# Altium PCB processor.PcbDoc
Units mm, origin at the board's own origin, x right, y up, seen from the top; angles counter-clockwise.
Board outline 35.25 x 27.25 mm, 4 copper layers (Top Layer, GND, VCC, Bottom Layer), stack 0.778 mm thick; 57 components, 50 nets, 257 pads, 50 vias.
Unrouted connection lines stored in the file: 1.
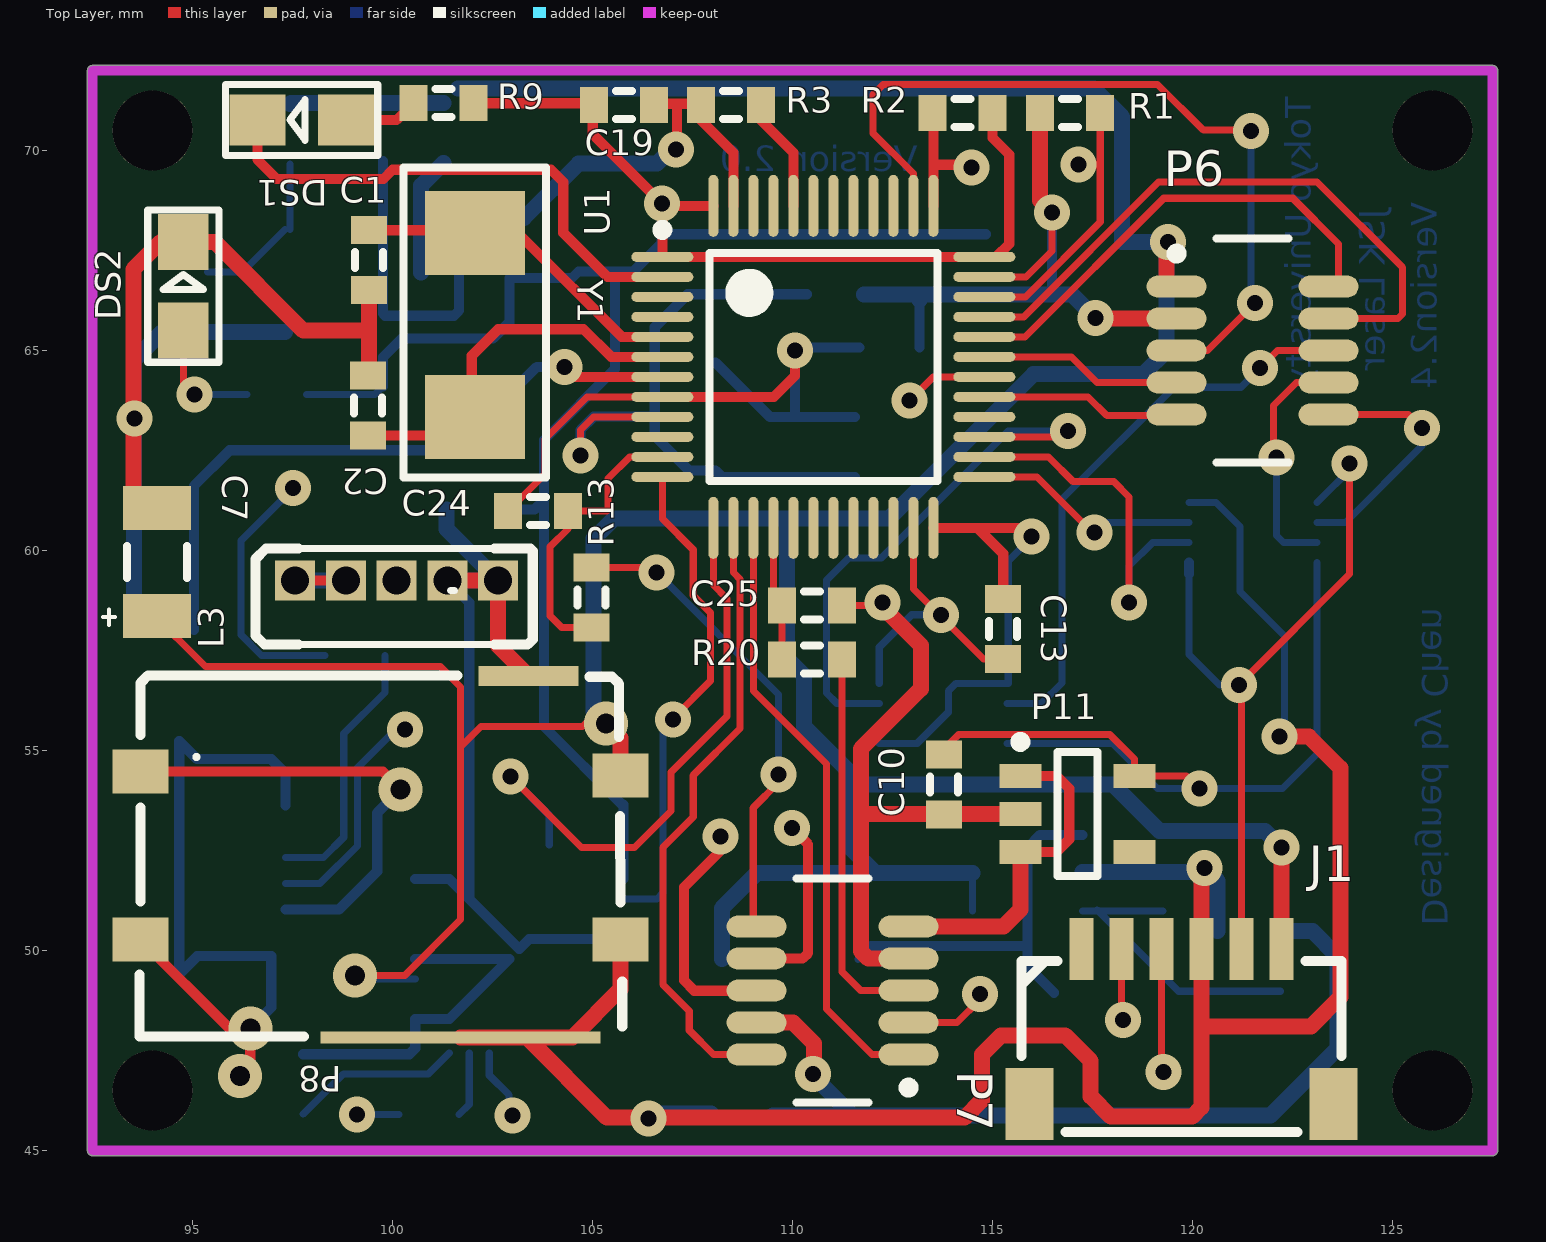
[diagram p0: Top Layer view]
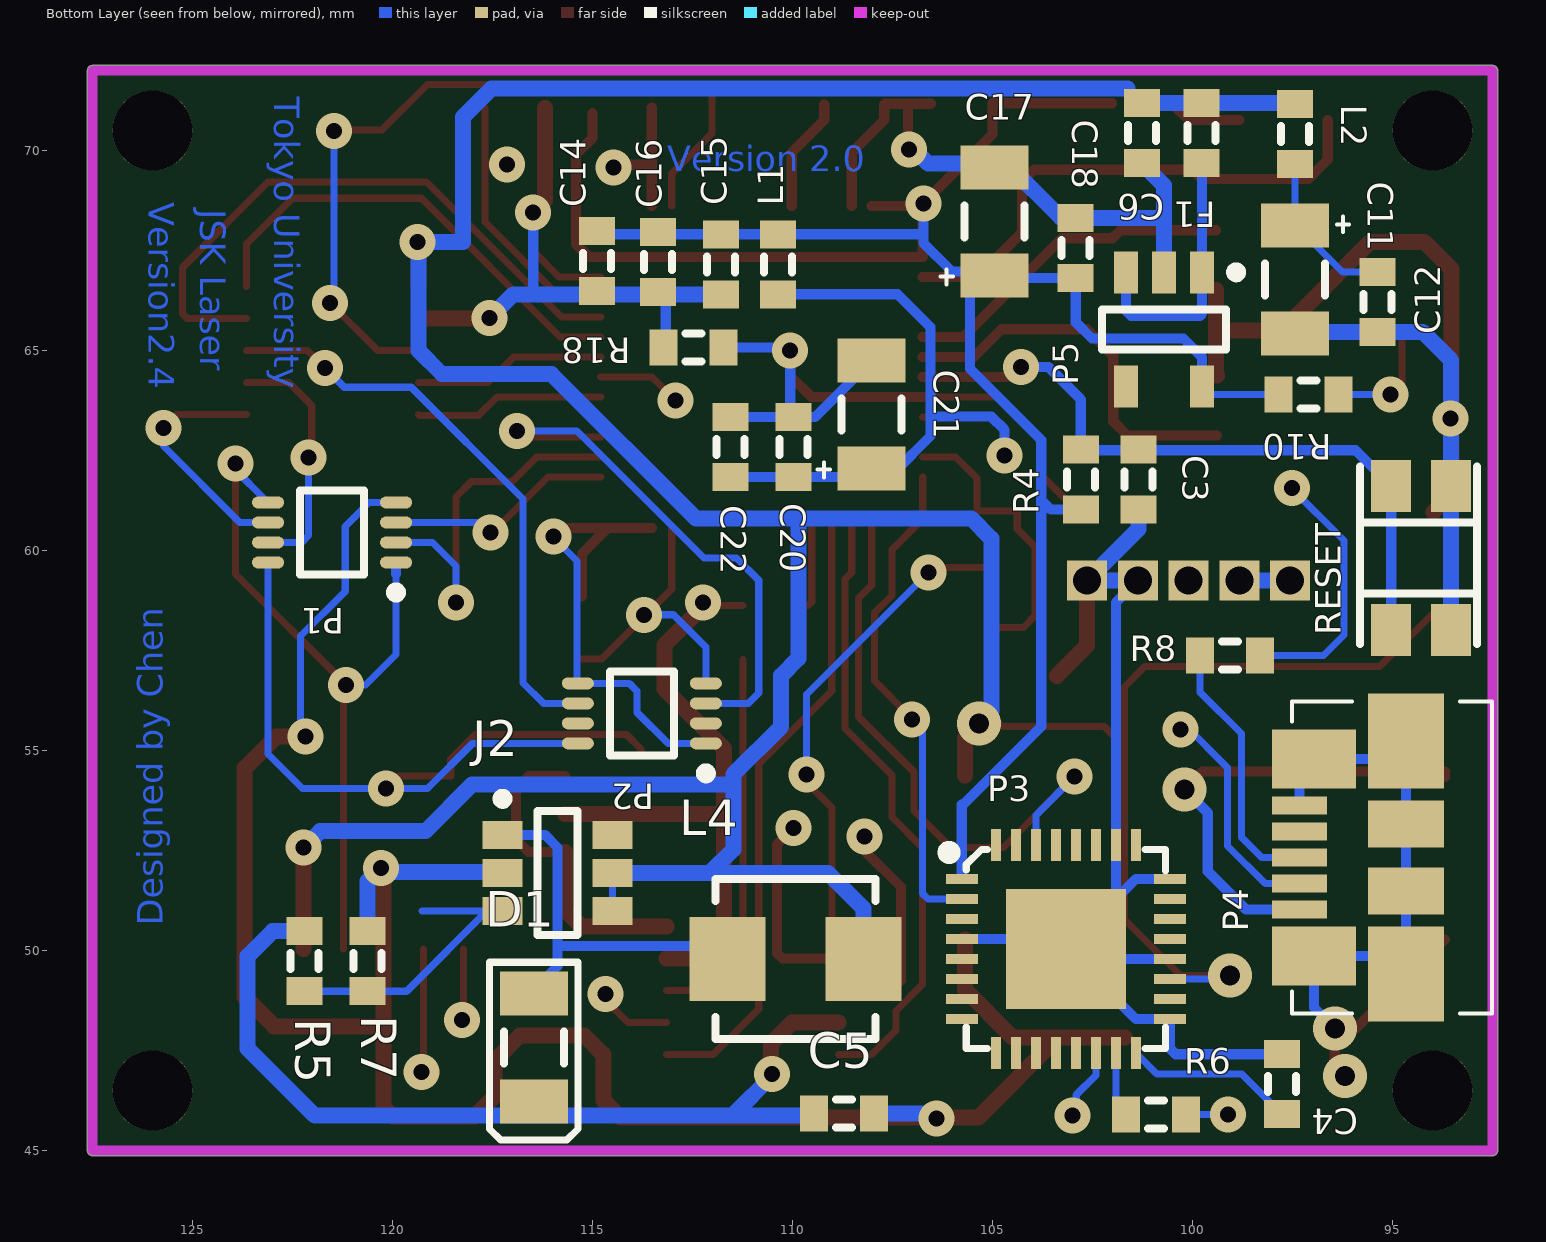
[diagram p1: Bottom Layer view, seen from below]
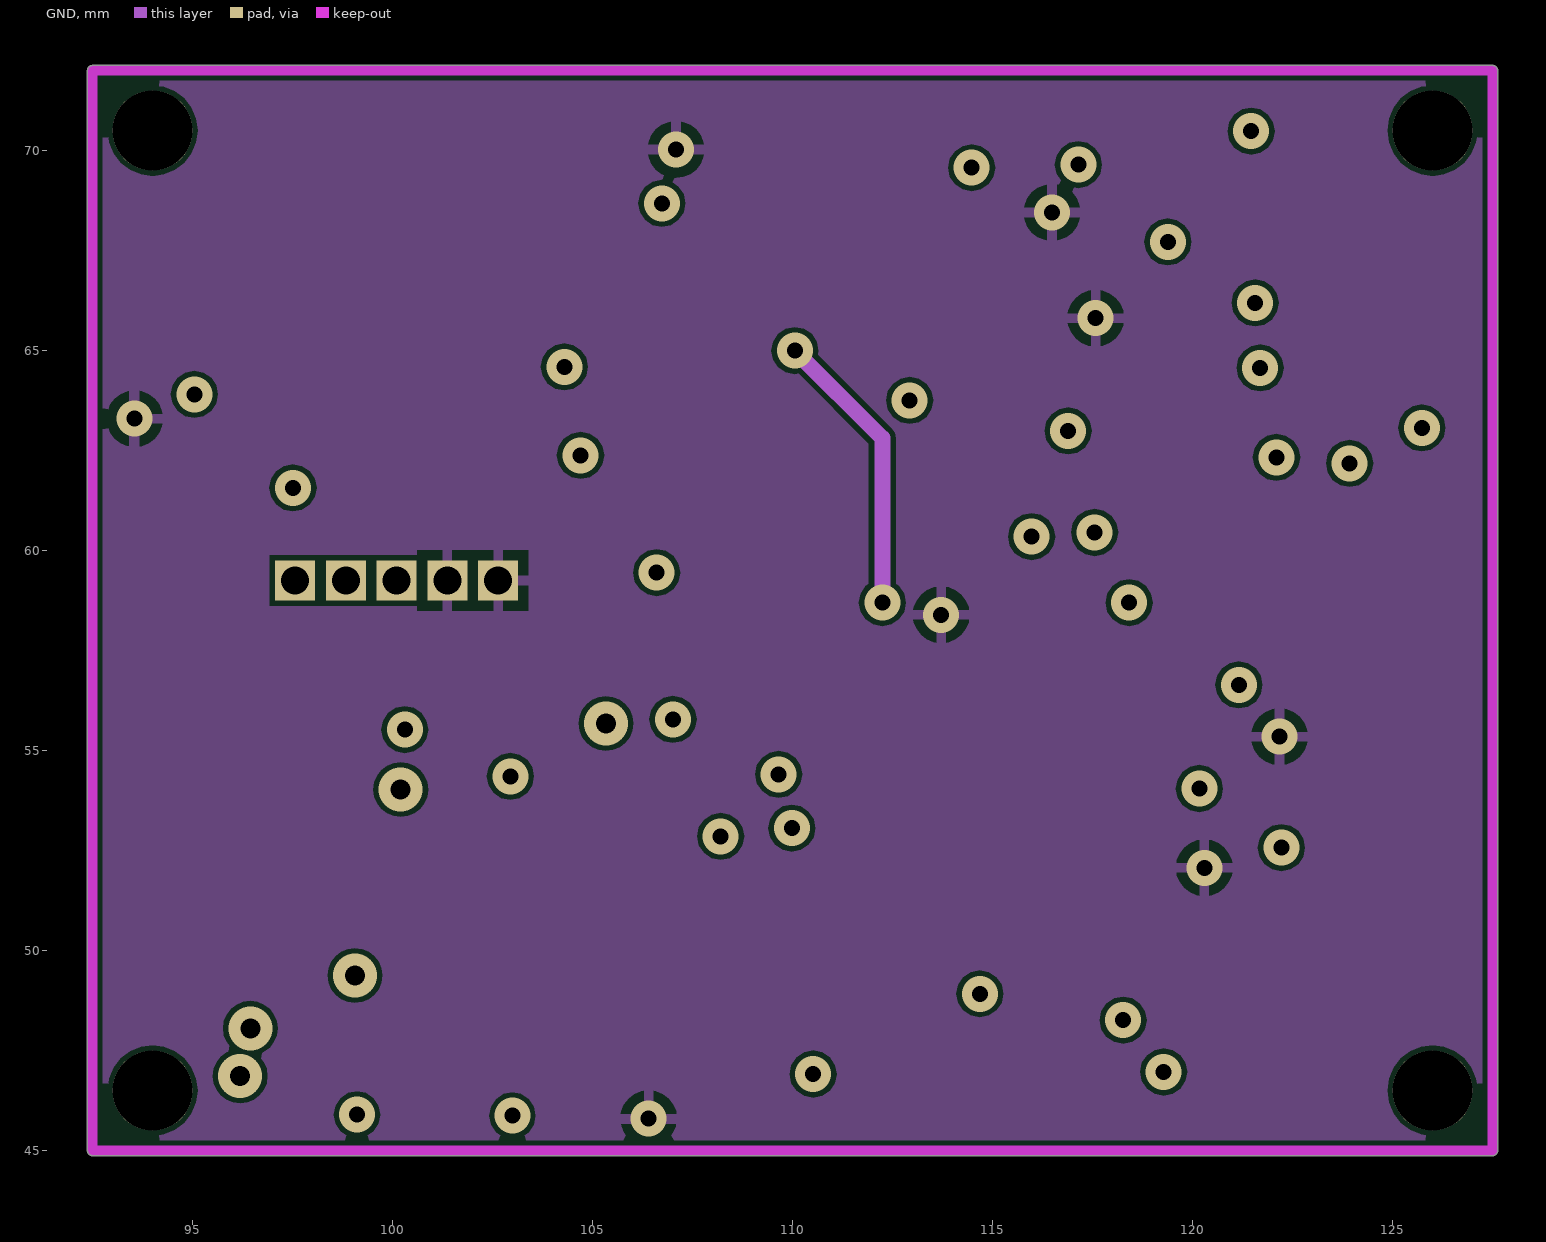
[diagram p2: GND]
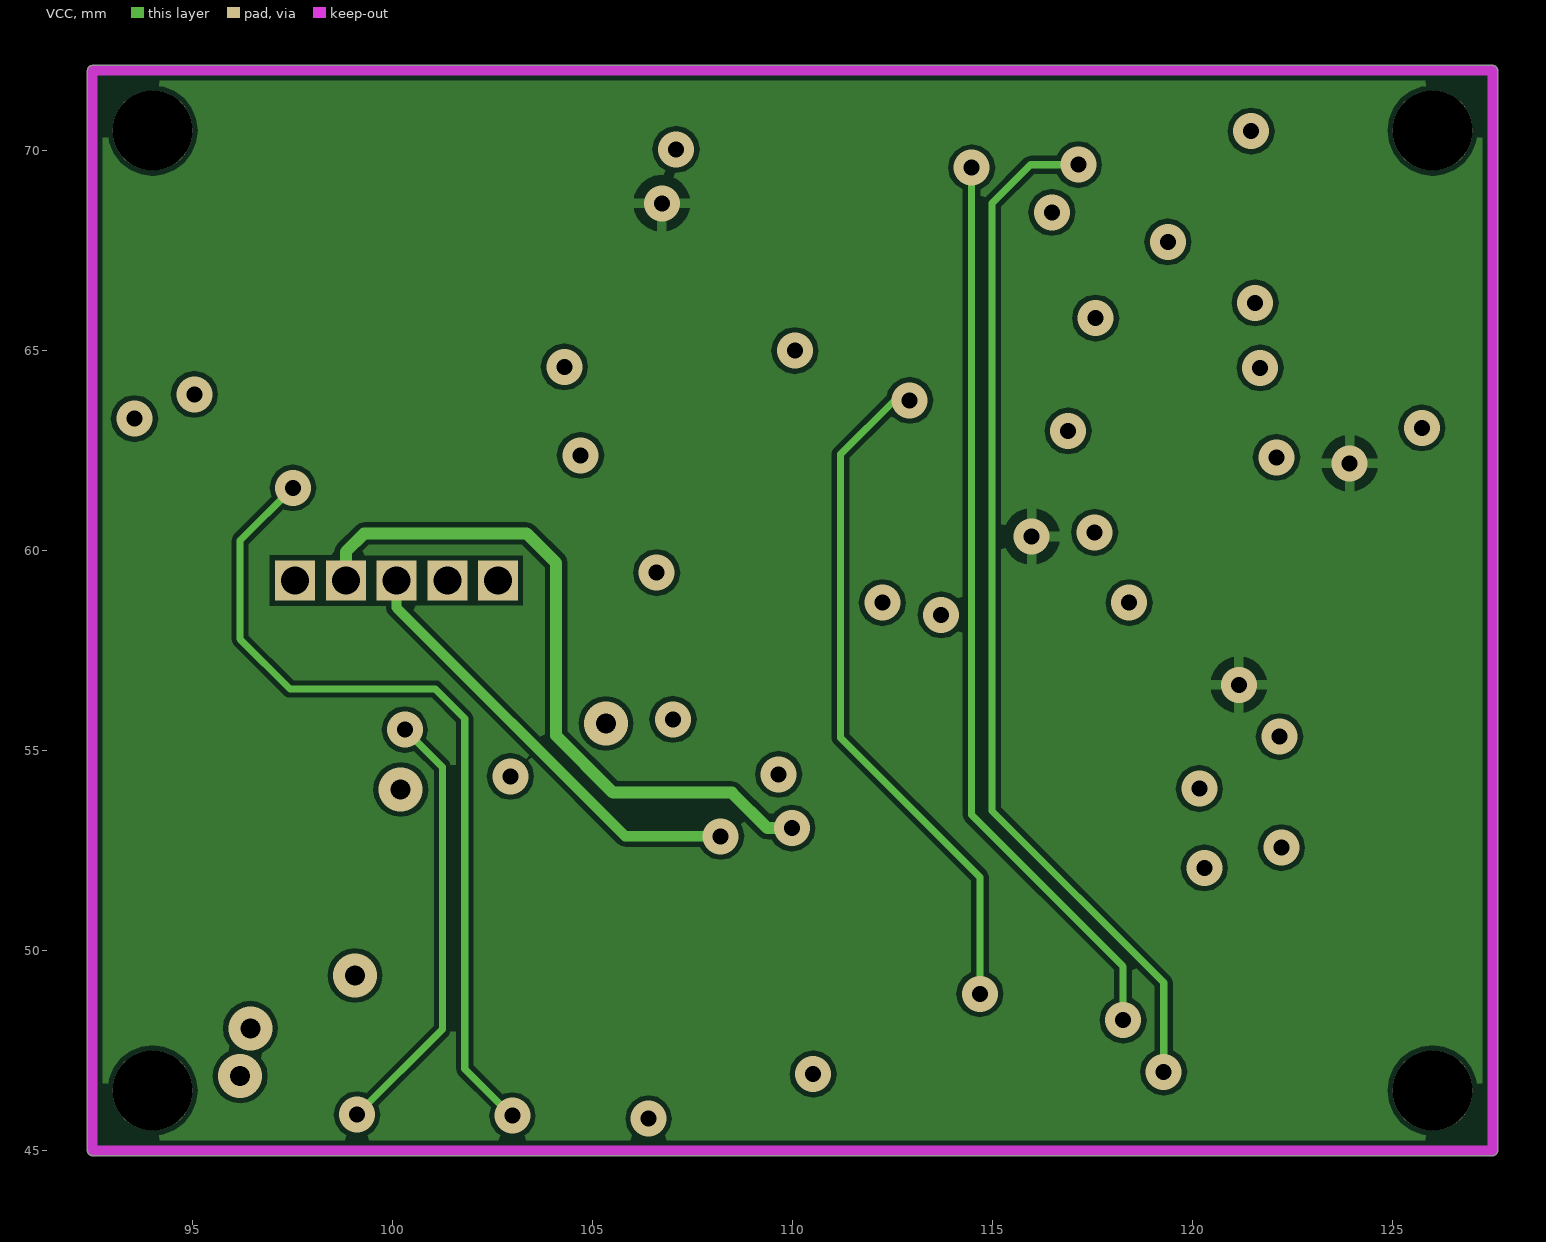
[diagram p3: VCC]

## Layer stack, top to bottom
Top Solder: solder mask 0.0102, Solder Resist, Dk 3.5
Top Layer: signal copper 0.0356
Dielectric 1: core 0.254, FR-4, Dk 4.2
GND: signal copper 0.036
Dielectric 3: prepreg 0.127, Dk 4.2
VCC: signal copper 0.036
Dielectric 2: core 0.254, Dk 4.2
Bottom Layer: signal copper 0.0356
Bottom Solder: solder mask 0.0102, Solder Resist, Dk 3.5

## Board outline
92.373,45 ccw(c92.5,45) 92.5,44.873 127.5,44.873 ccw(c127.5,45) 127.627,45 127.627,72 ccw(c127.5,72) 127.5,72.127 92.5,72.127 ccw(c92.5,72) 92.373,72

## Design rules (kind name [scope] priority, off if disabled: settings)
Clearance [All] p1: gap=0.127
PolygonConnect [All] p1: connectstyle=Relief reliefconductorwidth=0.254 reliefentries=4 polygonreliefangle="90 Angle" airgapwidth=0.254
RoutingVias [All] p1: holewidth=0.711 width=1.27 viastyle="Through Hole" minholewidth=0.4 minwidth=0.4 maxholewidth=0.711 maxwidth=1.27
SolderMaskExpansion [All] p1: expansion=0.102
Width [All] p1: maxlimit=0.4 minlimit=0.178 preferedwidth=0.178
30 further rules are at their usual default settings.

## Classes and differential pairs
component class test: C5 C10 C11 C12 D1 DS1 DS2 J2 L2 L4 P1 P2 P6 P7 P11 R5 R7 R9 R10
component class processor: C1 C2 C3 C4 C6 C7 C13 C14 C15 C16 C17 C18 C19 C20 C21 C22 C24 C25 F1 J1 L1 L3 P3 P4 P5 P8 R1 R2 R3 R4 R6 R8 R13 R18 R20 RES RESET Text U1 Y1

## Components (designator, comment, footprint, x,y, rotation, side; value= is the part's Value field where it differs from the comment)
C1 "cap" J1-0603 99.416,67.259 r90 top
C2 "cap" J1-0603 99.39,63.627 r270 top
C3 "cap" J1-0603 101.346,61.773 r90 bottom
C4 "cap" J1-0603 97.765,46.66 r270 bottom
C5 "cap" J1-0603 108.712,45.923 r0 bottom
C6 "cap" J1-0603 101.27,70.434 r90 bottom
C7 "Cap Pol2" C1206+ 94.107,59.715 r180 top
C10 "cap" J1-0603 113.792,54.153 r90 top
C11 "Cap Pol2" C1206+ 97.434,66.777 r180 bottom
C12 "cap" J1-0603 95.377,66.218 r90 bottom
C13 "cap" J1-0603 115.265,58.039 r90 top
C14 "cap" J1-0603 114.884,67.234 r90 bottom
C15 "cap" J1-0603 111.785,67.158 r90 bottom
C16 "cap" J1-0603 113.36,67.208 r90 bottom
C17 "Cap Pol2" C1206+ 104.953,68.224 r0 bottom
C18 "cap" J1-0603 102.921,67.564 r270 bottom
C19 "cap" J1-0603 105.791,71.145 r180 top
C20 "cap" J1-0603 109.982,62.586 r270 bottom
C21 "Cap Pol2" C1206+ 108.026,63.398 r0 bottom
C22 "cap" J1-0603 111.557,62.586 r270 bottom
C24 "cap" J1-0603 103.632,60.985 r0 top
C25 "cap" J1-0603 110.49,58.623 r180 top
D1 "Diode" D1206 116.459,47.523 r180 bottom
DS1 "LED0" SMDLED 98.831,70.764 r180 top
DS2 "LEDPWR" SMDLED 94.767,65.507 r90 top
F1 "Fuse 1" J1-0603 99.771,70.434 r90 bottom
J1 "SM06B-SRSS-TB" SM06B-SRSS-TB 115.722,45.466 r0 top
J2 "sx1308" sot23-6 115.875,51.943 r180 bottom
L1 "Ferrite Bead" J1-0603 110.363,67.158 r90 bottom
L2 "Ferrite Bead" J1-0603 97.434,70.409 r270 bottom
L3 "OSRAM SPL LL90-3" SPLLL 100.1,59.25 r0 top
L4 "Inductor" induct4*4 109.931,49.784 r180 bottom
P1 "sn74avc2t45" TSSOP8 121.514,60.452 r0 bottom
P2 "sn74avc2t45" TSSOP8 113.767,55.931 r0 bottom
P3 "FT232RQ" QFN32 103.124,50.013 r90 bottom
P4 "047346-1001" 047346-1001 94.666,52.324 r0 bottom
P5 "MCP1824T-3302" SOT-23 100.711,65.532 r270 bottom
P6 "MOLEX 52465" btb10p_m 121.5,65 r0 top
P7 "MOLEX 52465" btb10p_m 111,49 r180 top
P8 "filter" bx025 99.695,52.375 r0 top
P11 "MCP1824T-3002" SOT-23 117.119,53.416 r0 top
R1 "Res" J1-0603 116.942,70.942 r180 top
R2 "Res" J1-0603 114.249,70.942 r0 top
R3 "Res" J1-0603 108.458,71.145 r0 top
R4 "Res" J1-0603 102.794,61.773 r270 bottom
R5 "Res" J1-0603 122.199,49.733 r270 bottom
R6 "Res" J1-0603 100.914,45.898 r0 bottom
R7 "Res" J1-0603 120.625,49.733 r90 bottom
R8 "Res" J1-0603 99.06,57.379 r180 bottom
R9 "Res" J1-0603 101.27,71.184 r0 top
R10 "Res" J1-0603 97.104,63.906 r0 bottom
R13 "Res" J1-0603 104.978,58.826 r90 top
R18 "isolation resistor" J1-0603 112.471,65.075 r0 bottom
R20 "Res" J1-0603 110.49,57.277 r0 top
RESET "KEY_M" TSWITCH 94.285,59.817 r90 bottom
U1 "STM32F103C6T6" LQFP48_L 110.769,64.592 r0 top
Y1 "8M" XTALSMD8 102.057,65.634 r90 top

## Footprints (in the part's own frame and the unit in brackets; to place one, negate y for a bottom-side part, rotate by r counter-clockwise, add the part's x,y. Pads: shape width x height; smd on the part's side, far side on the other; paste and mask are expansions set on the pad)
047346-1001 [mm] "Micro USB B"
  rect 1.9x2.375 smd: 0(0,-2.913) 0(0,2.913)
  rect 1.9x1.175 smd: 0(0,-0.837) 0(0,0.837)
  rect 2.1x1.475 smd: 0(2.3,-2.462) 0(2.3,2.462)
  rect 1.38x0.45 smd: 1(2.66,1.3) 2(2.66,0.65) 3(2.66,0) 4(2.66,-0.65) 5(2.66,-1.3)
  silkscreen extent -2.15,-3.9 2.85,3.9, body extent -2.15,-3.9 2.85,3.9, height 2.69
btb10p_m [mm] "SOJ, 1molex board to board 10p, male"
  oval 1.5x0.55 smd: 1(-1.9,1.6) 2(-1.9,0.8) 3(-1.9,0) 4(-1.9,-0.8) 5(-1.9,-1.6) 6(1.9,-1.6) 7(1.9,-0.8) 8(1.9,0) 9(1.9,0.8) 10(1.9,1.6)
  silkscreen extent -2.02,-2.8 0.9,2.8, body extent -1.6,-2.8 1.6,2.8, height 4.5
bx025 [mm]
  rect 1.4x1.1 smd: 1(-6,2.1) 2(6,2) 3(-6,-2.1) 4(6,-2.1)
  rect 7x0.3 smd: 4(2,-4.55)
  rect 2.5x0.5 smd: 4(3.7,4.492)
  silkscreen extent -6.02,-4.52 6.05,4.5
C1206+ [mm]
  rect 1.7x1.1 smd: 1(-0.005,1.352) 2(-0.005,-1.348)
  silkscreen extent -0.76,-0.4 1.35,1.57, body extent -0.91,-1.7 0.89,1.7, height 1.3
D1206 [mm]
  rect 1.7x1.1 smd: 1(-0.005,1.403) 2(-0.005,-1.297)
  silkscreen extent -1.12,-2.26 1.09,2.18, body extent -0.91,-1.65 0.89,1.75, height 1.3
induct4*4 [mm] "Precision Wire Wound Inductor, 2-Leads, Body 4.00x4.00mm, IPC Medium Density"
  rect 1.9x2.1 smd: 1(-1.7,0) 2(1.7,0)
  silkscreen extent -2,-2 2,2, body extent -2,-2 2,2, height 3
J1-0603 [mm] "Chip Resistor, Body 1.6x0.8mm, IPC High Density"
  rect 0.7x0.9 smd: 1(-0.75,0) 2(0.75,0)
  silkscreen extent -0.2,-0.35 0.2,0.35, body extent -0.85,-0.48 0.85,0.48, height 0.9
LQFP48_L [mm]
  oval 1.55x0.25 smd: 1(-4.025,2.75) 2(-4.025,2.25) 3(-4.025,1.75) 4(-4.025,1.25) 5(-4.025,0.75) 6(-4.025,0.25) 7(-4.025,-0.25) 8(-4.025,-0.75) 9(-4.025,-1.25) 10(-4.025,-1.75) 11(-4.025,-2.25) 12(-4.025,-2.75) 25(4.025,-2.75) 26(4.025,-2.25) 27(4.025,-1.75) 28(4.025,-1.25) 29(4.025,-0.75) 30(4.025,-0.25) 31(4.025,0.25) 32(4.025,0.75) 33(4.025,1.25) 34(4.025,1.75) 35(4.025,2.25) 36(4.025,2.75)
  oval 0.25x1.55 smd: 13(-2.75,-4.025) 14(-2.25,-4.025) 15(-1.75,-4.025) 16(-1.25,-4.025) 17(-0.75,-4.025) 18(-0.25,-4.025) 19(0.25,-4.025) 20(0.75,-4.025) 21(1.25,-4.025) 22(1.75,-4.025) 23(2.25,-4.025) 24(2.75,-4.025) 37(2.75,4.025) 38(2.25,4.025) 39(1.75,4.025) 40(1.25,4.025) 41(0.75,4.025) 42(0.25,4.025) 43(-0.25,4.025) 44(-0.75,4.025) 45(-1.25,4.025) 46(-1.75,4.025) 47(-2.25,4.025) 48(-2.75,4.025)
  silkscreen extent -4.15,-2.85 2.85,3.55
QFN32 [mm]
  rect 0.25x0.8 smd: 1(1.777,2.645) 2(1.277,2.645) 3(0.777,2.645) 4(0.277,2.645) 5(-0.223,2.645) 6(-0.723,2.645) 7(-1.223,2.645) 8(-1.723,2.645) 17(-1.723,-2.557) 18(-1.223,-2.557) 19(-0.723,-2.557) 20(-0.223,-2.557) 21(0.277,-2.557) 22(0.777,-2.557) 23(1.277,-2.557) 24(1.777,-2.557)
  rect 0.8x0.25 smd: 9(-2.574,1.794) 10(-2.574,1.294) 11(-2.574,0.794) 12(-2.574,0.294) 13(-2.574,-0.206) 14(-2.574,-0.706) 15(-2.574,-1.206) 16(-2.574,-1.706) 25(2.628,-1.706) 26(2.628,-1.206) 27(2.628,-0.706) 28(2.628,-0.206) 29(2.628,0.294) 30(2.628,0.794) 31(2.628,1.294) 32(2.628,1.794)
  rect 3x3 smd: 33(0.027,0.044)
  silkscreen extent -2.46,-2.45 2.58,3.1
SM06B-SRSS-TB [mm]
  rect 0.6x1.55 smd: 1(1.5,4.575) 2(2.5,4.575) 3(3.5,4.575) 4(4.5,4.575) 5(5.5,4.575) 6(6.5,4.575)
  rect 1.2x1.8 smd: ""(0.2,0.7) ""(7.8,0.7)
  silkscreen extent 0,0 8,4.28, body extent 0,0 8,4.95, height 2.96
SMDLED [mm]
  rect 1.4x1.27 smd: 1(0.001,-0.002) 2(2.211,-0.002)
  silkscreen extent -0.8,-0.89 3.01,0.89
sot23-6 [mm] "SOT23, 6-Leads, Body 2.90x2.80mm, Pitch 0.95mm, IPC Medium Density"
  rect 1x0.7 smd: 1(-1.375,0.95) 2(-1.375,0) 3(-1.375,-0.95) 4(1.375,-0.95) 5(1.375,0) 6(1.375,0.95)
  silkscreen extent -1.5,-1.55 0.5,1.97, body extent -0.88,-1.52 0.87,1.53, height 1.45
SOT-23 [mm] "SOT23, 5-Leads, Body 2.90x2.70mm, Pitch 0.95mm, IPC Medium Density"
  rect 1.05x0.6 smd: 1(-1.425,0.95) 2(-1.425,0) 3(-1.425,-0.95) 4(1.425,-0.95) 5(1.425,0.95)
  silkscreen extent -1.55,-1.55 0.5,1.92, body extent -0.9,-1.55 0.9,1.55, height 1.45
SPLLL [mm]
  rect 1x1 hole 0.7: 1(-2.54,0) 2(0,0) 3(2.54,0)
  silkscreen extent -3.53,-1.6 3.4,0.8
TSSOP8 [mm] "TSSOP, 8-Leads, Body 2.00x2.30mm, Pitch 0.50mm, IPC Medium Density"
  oval 0.8x0.3 smd: 1(-1.6,0.75) 2(-1.6,0.25) 3(-1.6,-0.25) 4(-1.6,-0.75) 5(1.6,-0.75) 6(1.6,-0.25) 7(1.6,0.25) 8(1.6,0.75)
  silkscreen extent -1.72,-1.05 0.8,1.62, body extent -1.2,-1.05 1.2,1.05, height 0.9
TSWITCH [mm]
  rect 1.3x1 smd: 1(-1.8,0.75) 1(1.8,0.75) 2(-1.8,-0.75) 2(1.8,-0.75)
  silkscreen extent -2.16,-1.4 2.29,1.52
XTALSMD8 [mm]
  rect 2.1x2.5 smd: 1(-2.3,0) 2(2.3,0)
  silkscreen extent -3.81,-1.78 3.94,1.78

## Part data
C1 C2 C3 C4 C5 C6 C10 C12 C13 C14 C15 C16 C18 C19 C20 C22 C24 C25: library part "Cap Semi", "Capacitor (Semiconductor SIM Model)"
C7 C11 C17 C21: "Polarized Capacitor (Axial)"
D1: "Default Diode"
DS1 DS2: library part LED2, "Typical RED, GREEN, YELLOW, AMBER GaAs LED"
F1: "Fuse"
J1: "Connector"
L1 L2: library part Inductor, "Inductor"
L3: library part SPL_laser
P4: "Micro USB B Connector"
P5 P11: library part VOLTREG
P6 P7: library part header10
R1 R2 R3 R4 R5 R6 R7 R8 R9 R10 R13 R20: library part Res3, "Resistor"
R18: library part Res2, "Resistor"
U1: "STM32 ARM-based 32-bit MCU with 32 Kbytes Flash, 48-pin LQFP, Industrial Temperature"
Y1: library part XTAL, "Crystal Oscillator"

## Free pads (board coordinates)
  round 2 hole 2: 0(94,46.5) 0(94,70.5) 0(126,46.5) 0(126,70.5)
  rect 1x1 hole 0.7: 0(98.83,59.25) 0(101.37,59.25)

## Via types
v1: diameter 0.9, hole 0.4, Top Layer to Bottom Layer, 45 vias
v2: diameter 1.1, hole 0.5, Top Layer to Bottom Layer, 5 vias

## Nets (pads, with @x,y where several pads share a name; then routed paths per layer and width w, separated by ;. In a path a pad name is that pad's centre, name@x,y a point inside that pad or via, vN(x,y) a via of type N, cw(c..) or ccw(c..) an arc to the next point about the centre after c; other vN are vias at no path point)
1.0: P7.10 U1.14 | length 15.4
  Top Layer w0.178: U1.14 108.519,59.451 108.687,59.284 108.687,55.55 107.518,54.381 107.518,53.34 106.756,52.578 106.756,49.149 107.417,48.489 107.417,48.006 108.023,47.4 P7.10@108.85,47.4
3.0: C10.2 P1.8 P2.8 P11.5 | length 20.8
  Top Layer w0.178: C10.2 113.792,55.042 114.148,55.397 117.932,55.397 118.544,54.785 P11.5 119.852,54.366 v1(120.167,54.051)
  Bottom Layer w0.178: P2.8 117.996,55.181 119.126,54.051 v1(120.167,54.051) 122.25,54.051 123.114,54.915 P1.8
4.25: P7.1 U1.15 | length 15.6
  Top Layer w0.178: U1.15 109.019,56.49 110.846,54.663 110.846,48.539 111.985,47.4 P7.1@113.15,47.4
5IN: P4.1 P8.1 | length 11.8
  Top Layer w0.254: P8.1@93.695,54.336 P8.1 99.754,54.475 v2(100.203,54.026)
  Bottom Layer w0.254: P4.1 98.658,51.024 99.619,51.985 99.619,53.442 v2(100.203,54.026)
15V: C5.2 D1.2 P7.9 R5.1 | length 22.9
  Top Layer w0.4: P7.9@108.85,48.2 110.017,48.2 110.541,47.676 v1@110.541,46.99
  Bottom Layer w0.4: C5.2@109.513,45.872 111.506,45.872 ; v1@110.465,46.914 111.506,45.872 ; R5.1 122.999,50.483 123.622,49.86 123.622,47.549 121.945,45.872 111.506,45.872
  other v1: 110.515,46.914
+5: C6.2 C7.1 F1.2 J1.6 J2.4 J2.5 L2.1 L4.2 P3.19 P6.1 P8.2 | length 107
  Top Layer w0.178: C7.1@93.904,58.518 95.322,57.099 101.194,57.099 101.702,56.591 101.702,55.093 ; v2(99.06,49.378) 100.305,49.378 101.702,50.775 101.702,55.093 ; v2@105.232,56.083 104.75,55.601 102.21,55.601 101.702,55.093 ; v1@119.35,67.686 v1(119.38,67.716)
  Top Layer w0.4: v2(105.334,55.677) 105.695,55.316 P8.2 ; P6.1@119.35,66.6 v1@119.35,67.686 ; J1.6 v1(122.222,52.576)
  Bottom Layer w0.178: v2(99.06,49.378) 99.148,49.29 P3.19 ; J2.4 J2.5
  Bottom Layer w0.4: L2.1 97.46,71.184 F1.2 C6.2 ; 101.632,71.546 117.532,71.546 118.237,70.841 118.237,67.716 v1(119.38,67.716) ; v2(105.334,55.677) 105.029,55.982 105.029,60.3 105.537,60.808 109.855,60.808 ; L4.2 108.231,51.056 109.118,51.943 112.065,51.943 ; J2.5 112.065,51.943 ; v1@119.35,67.686 119.35,65 118.764,64.414 116.027,64.414 112.42,60.808 109.855,60.808 ; v1(122.222,52.576) 121.814,52.984 119.177,52.984 118.008,54.153 111.481,54.153 ; 109.855,60.808 109.855,57.302 110.287,56.871 110.287,55.601 111.481,54.407 111.481,54.153 ; 111.481,54.153 111.481,52.527 112.065,51.943
DCLCK: P6.10 U1.32 | length 11.8
  Top Layer w0.178: U1.32 115.812,65.342 119.278,68.809 122.504,68.809 123.65,67.663 P6.10@123.65,66.6
GAA: C10.1 C20.1 C21.2 C22.1 C24.1 C25.1 P7.4 P11.2 R18.1 U1.8 | length 40.5
  Top Layer w0.178: C24.1 103.81,61.913 103.81,62.789 104.863,63.842 U1.8 ; C25.1 112.217,58.623 v1@112.319,58.623
  Top Layer w0.254: U1.8 109.537,63.842 110.058,64.364 v1(110.058,64.999)
  Top Layer w0.4: 111.76,53.416 P11.2 ; v1@112.217,58.623 113.208,57.633 113.208,56.54 111.709,55.042 111.709,49.987 111.896,49.8 P7.4@113.15,49.8
  GND w0.4: v1(110.058,64.999) 112.243,62.814 v1(112.243,58.699)
  Bottom Layer w0.254: C21.2@108.077,64.698 109.439,63.336 C20.1 ; C22.1 C20.1 ; R18.1@111.67,65.075 110.134,65.075 v1(110.058,64.999) 110.058,63.412 C20.1
GIN: P4.0 P4.5 P8.3 | length 19.1
  Top Layer w0.254: P8.3 95.913,48.057 v2(96.444,48.057) 96.444,47.117 v2(96.19,46.863)
  Bottom Layer w0.254: v2(96.444,48.057) 96.966,48.579 96.966,49.862 95.116,49.862 94.666,49.411 94.666,51.487 94.666,53.161 94.666,55.237 95.116,54.786 96.966,54.786 97.326,54.427 P4.5
GND: C1.1 C2.1 C3.1 C4.1 C5.1 C6.1 C7.2 C11.2 C12.1 C13.1 C14.1 C15.1 C16.1 C17.2 C18.1 C19.1 DS2.2 J1.4 J2.2 L3.3 P1.4 P2.4 P3.4 P3.17 P3.20 P3.24 P3.26 P5.2 P6.2 P8.4 pad.0@101.37,59.25 R1.2 R3.1 R7.2 R18.2 RESET.2 U1.23 U1.35 U1.47 | length 155.7
  Top Layer w0.178: U1.23 113.019,59.04 114.771,57.289 C13.1 ; U1.35 115.839,66.842 116.484,67.488 v1(116.484,68.453)
  Top Layer w0.254: C19.1@106.541,71.171 107.112,71.171 ; v1@107.112,70.002 107.112,71.171 ; U1.47 108.519,69.953 107.708,70.764 R3.1 107.683,71.171 107.112,71.171
  Top Layer w0.4: C7.2@93.98,60.964 93.523,61.421 93.523,67.031 94.21,67.717 95.554,67.717 97.771,65.5 99.384,65.5 99.416,65.532 ; C2.1 99.416,64.402 99.416,65.532 ; C1.1 99.416,65.532 ; pad.0@101.37,59.25 L3.3 102.64,57.622 P8.4@103.395,56.867 ; P8.4@101.695,47.825 104.492,47.825 105.695,49.028 P8.4@105.695,50.275 ; P8.4@101.956,47.828 103.353,47.828 105.359,45.822 114.3,45.822 114.732,46.253 114.732,47.396 115.214,47.879 116.815,47.879 117.45,47.244 117.45,46.355 117.958,45.847 119.99,45.847 120.222,46.08 120.222,48.108 ; R1.2@116.192,71.069 116.192,68.746 v1(116.484,68.453) ; v1@117.577,65.8 P6.2@119.35,65.8 ; v1@120.222,51.998 J1.4 120.222,48.108 ; v1(122.174,55.347) 122.911,55.347 123.698,54.559 123.698,48.844 122.961,48.108 120.222,48.108
  Bottom Layer w0.178: v1@106.375,45.491 v1@106.375,45.683 ; P2.4 112.167,57.582 112.979,58.395 v1(113.716,58.395) ; v1@117.221,65.811 v1(117.577,65.811) ; P1.4 120.586,61.202 121.183,60.604 121.183,58.979 122.301,57.861 v1@122.301,55.347
  Bottom Layer w0.254: C4.1 100.42,47.41 100.567,47.557 P3.17 101.418,48.29 102.918,49.79 P3.20 ; P3.24 101.418,51.79 101.918,51.29 ; pad.0@101.37,59.25 101.918,58.702 P3.26 101.918,51.29 ; P3.4 103.418,50.29 103.168,50.04 101.918,51.29 ; R18.2@113.17,65.075 C16.1@113.17,66.269 ; C16.1@113.309,66.408 C16.1 ; 116.484,66.446 v1(116.484,68.453)
  Bottom Layer w0.4: RESET.2@93.535,58.017 93.535,61.617 93.535,64.757 94.246,65.468 C11.2@97.307,65.468 ; P5.2 100.711,68.326 ; C6.1 100.711,69.125 100.711,68.326 ; C3.1 101.346,60.544 L3.3 pad.0@101.37,59.25 ; v1@106.375,45.683 106.616,45.923 C5.1 ; v1(107.086,70.028) 106.959,70.028 106.608,69.676 104.648,69.676 103.286,68.314 C18.1 100.723,68.314 100.711,68.326 ; C15.1 116.98,66.408 v1(117.577,65.811) ; C16.1@113.17,66.269 C16.1@113.17,66.408 ; J2.2@117.25,51.968 120.396,51.968 120.625,51.74 R7.2
  other v1: 106.401,45.796 120.294,52.07 93.548,63.297
LED0: DS1.2 U1.2 | length 13.3
  Top Layer w0.254: DS1.2 96.621,69.775 97.104,69.291 99.771,69.291 100,69.52 103.962,69.52 104.267,69.215 104.267,67.945 105.37,66.842 U1.2
MCLK: P6.5 U1.29 | length 4.8
  Top Layer w0.178: U1.29 117.387,63.842 117.856,63.373 119.323,63.373 P6.5@119.35,63.4
NetC1_2: C1.2 U1.5 Y1.2 | length 8.4
  Top Layer w0.254: C1.2 101.804,68.009 102.006,67.807 102.057,67.807 103.262,67.807 105.727,65.342 U1.5
NetC2_2: C2.2 U1.6 Y1.1 | length 9.7
  Top Layer w0.254: C2.2 101.626,62.877 101.981,63.232 101.981,64.872 102.641,65.532 104.775,65.532 105.465,64.842 U1.6
NetC3_2: C3.2 R4.1 RESET.1 U1.7 | length 17.4
  Top Layer w0.254: v1(104.292,64.592) 104.542,64.342 U1.7
  Bottom Layer w0.254: RESET.1@95.035,58.017 95.035,60.503 95.035,61.617 95.927,62.509 R4.1@102.819,62.509 ; R4.1 102.794,63.779 103.607,64.592 v1(104.292,64.592)
NetC4_2: C4.2 P3.16 | length 4.3
  Bottom Layer w0.178: C4.2 98.769,46.914 100.893,46.914 P3.16
NetC11_1: C11.1 C12.2 L2.2 | length 4
  Bottom Layer w0.178: C12.2 96.25,66.968 C11.1@97.307,68.025 ; C11.1@97.434,68.025 L2.2
NetD1_1: D1.1 J2.1 L4.1 | length 9.8
  Bottom Layer w0.178: L4.1 L4.1@111.961,50.114
  Bottom Layer w0.254: L4.1@111.961,50.114 115.875,50.114 ; D1.1@116.537,48.944 115.875,49.606 115.875,50.114 ; J2.1 116.19,52.893 115.875,52.578 115.875,50.114
NetDS1_1: DS1.1 R9.1 | length 1.9
  Top Layer w0.254: DS1.1 100.102,70.766 R9.1
NetDS2_1: DS2.1 R10.1 | length 3
  Top Layer w0.178: DS2.1 94.769,64.184 v1(95.047,63.906)
  Bottom Layer w0.178: v1(95.047,63.906) R10.1
NetF1_1: F1.1 P5.1 P5.3 | length 6.7
  Bottom Layer w0.254: F1.1@99.761,69.735 P5.1 99.761,65.923 99.812,65.872 101.534,65.872 101.661,65.999 P5.3
NetJ2_3: J2.3 R5.2 R7.1 | length 7.4
  Bottom Layer w0.178: J2.3 119.263,50.993 ; J2.3@117.612,51.018 119.647,48.983 R7.1 R5.2
NetP4_2: P4.2 R6.1 | length 17.8
  VCC w0.178: v1(99.111,45.898) 101.244,48.031 101.244,54.585 v1(100.305,55.524)
  Bottom Layer w0.178: P4.2 98.181,51.674 99.123,52.616 99.123,54.572 v1@100.19,55.639 ; v1(99.111,45.898) 99.009,45.898 R6.1
NetP4_3: P4.3 R8.1 | length 6.6
  Bottom Layer w0.178: P4.3 98.273,52.324 98.781,52.832 98.781,55.423 99.81,56.452 R8.1
NetR3_2: R3.2 U1.44 | length 2.9
  Top Layer w0.254: R3.2 109.208,70.764 110.019,69.953 U1.44
P_RESET: P6.3 U1.38 | length 20.3
  Top Layer w0.178: U1.38 113.019,69.429 112.014,70.434 112.014,71.399 112.268,71.653 119.126,71.653 120.269,70.51 v1@121.488,70.51 ; P6.3@119.35,65 120.372,65 v1(121.564,66.192)
  Bottom Layer w0.178: v1(121.463,70.485) 121.463,66.294 v1(121.564,66.192)
P_SAM: P6.9 U1.33 | length 15.5
  Top Layer w0.178: U1.33 115.779,65.842 119.151,69.215 123.114,69.215 125.247,67.081 125.247,65.913 125.134,65.8 P6.9@123.65,65.8
PA2_U2TX: P3.2 U1.12 | length 12.4
  Top Layer w0.178: U1.12 106.744,60.794 107.518,60.02 107.518,58.877 107.95,58.445 107.95,56.744 v1@107.061,55.855
  Bottom Layer w0.178: P3.2 106.611,51.29 106.756,51.435 106.756,55.524 v1(107.01,55.778)
PA3_U2RX: P3.30 U1.13 | length 15
  Top Layer w0.178: v1(102.946,54.356) 104.724,52.578 106.045,52.578 106.959,53.492 106.959,54.458 108.356,55.855 108.356,58.801 108.019,59.138 U1.13
  Bottom Layer w0.178: v1(102.946,54.356) 103.918,53.384 P3.30
PA9_HRTIM_A2: P7.2 U1.30 | length 21.2
  Top Layer w0.178: v1(112.928,63.754) 113.517,64.342 U1.30 ; P7.2@113.15,48.2 114.113,48.2 114.681,48.768 v1(114.681,48.92)
  VCC w0.178: v1(112.928,63.754) 112.547,63.754 111.201,62.408 111.201,55.321 114.681,51.841 v1(114.681,48.92)
PA13: J1.3 R1.1 U1.34 | length 36.2
  Top Layer w0.178: U1.34 115.821,66.342 117.692,68.212 117.692,69.647 ; v1(117.145,69.647) 117.692,69.647 ; R1.1@117.692,71.069 R1.1 117.692,69.647 ; J1.3 119.222,47.021 v1(119.278,46.965)
  VCC w0.178: v1(117.145,69.647) 115.951,69.647 114.986,68.682 114.986,53.492 119.278,49.2 v1(119.278,46.965)
PA14: J1.2 R2.1 U1.37 | length 28.1
  Top Layer w0.178: J1.2 118.222,48.3 v1(118.262,48.26)
  Top Layer w0.254: U1.37 113.519,69.647 ; R2.1@113.519,71.069 113.519,69.647 ; v1(114.478,69.571) 114.402,69.647 113.519,69.647
  VCC w0.178: v1(114.478,69.571) 114.478,53.391 118.262,49.606 v1(118.262,48.26)
PB12_HRTIM_C1: P1.3 U1.25 | length 6
  Top Layer w0.178: U1.25 116.11,61.842 117.5,60.452 v1(117.551,60.452) 117.551,60.3 v1@117.5,60.249
  Bottom Layer w0.178: v1(117.551,60.452) 117.801,60.702 P1.3
PB13_HRTIM_C2: P1.2 U1.26 | length 9.3
  Top Layer w0.178: U1.26 116.398,62.342 117.018,61.722 118.034,61.722 118.415,61.341 v1(118.415,58.699)
  Bottom Layer w0.178: v1(118.415,58.699) 118.415,59.614 119.003,60.202 P1.2
PB14_HRTIM_D1: P2.3 U1.27 | length 13.9
  Top Layer w0.178: U1.27 v1@116.891,62.842
  Bottom Layer w0.178: P2.3 111.104,56.181 110.846,56.439 110.846,59.258 111.404,59.817 112.217,59.817 115.392,62.992 v1(116.891,62.992)
R_TRIG: P6.4 U1.31 | length 4.8
  Top Layer w0.178: U1.31 116.971,64.842 117.613,64.2 P6.4@119.35,64.2
TERTG: L3.1 P7.7 pad.0@98.83,59.25 | length 25.2
  Top Layer w0.178: v1@109.906,53.137 v1(109.982,53.061)
  Top Layer w0.254: L3.1 pad.0@98.83,59.25 ; P7.7@108.85,49.8 110.252,49.8 110.388,49.936 110.388,52.654 v1(109.982,53.061)
  VCC w0.3: pad.0@98.83,59.25 98.83,59.968 99.289,60.427 103.353,60.427 104.089,59.69 104.089,55.372 105.512,53.95 108.483,53.95 109.372,53.061 v1(109.982,53.061)
  Bottom Layer w0.4: L3.1 pad.0@98.83,59.25
TESTD: L3.2 P7.8 | length 17.9
  Top Layer w0.178: 107.82,49 P7.8@108.85,49 ; v1@108.204,52.502 v1(108.204,52.857)
  Top Layer w0.254: v1@108.204,52.502 107.29,51.587 107.29,49.251 107.544,48.997 P7.8@108.89,48.997
  VCC w0.254: L3.2 100.1,58.574 105.816,52.857 v1(108.204,52.857)
USBD+: P3.14 R8.2 | length 29.5
  VCC w0.178: v1(97.511,61.57) 96.19,60.249 96.19,57.785 97.434,56.54 101.067,56.54 101.803,55.804 101.803,47.041 v1@103.022,45.822
  Bottom Layer w0.178: v1@97.536,61.57 96.215,60.249 96.215,57.887 96.723,57.379 R8.2 ; P3.14 102.418,46.883 102.907,46.394 v1@102.907,45.923
  other v1: 102.997,45.872
USBD-: P3.15 R6.2 | length 1.6
  Bottom Layer w0.178: R6.2 101.918,46.152 P3.15
VAA: P7.5 P11.1 P11.3 | length 8.1
  Top Layer w0.254: P11.3 116.601,52.466 116.916,52.781 116.916,54.051 116.601,54.366 P11.1
  Top Layer w0.4: P7.5@113.15,50.6 115.268,50.6 115.694,51.026 P11.3
VCC: C13.2 C14.2 C15.2 C16.2 C17.1 C18.2 C19.2 J1.5 L1.2 P1.1 P1.5 P2.1 P2.5 P3.1 P5.5 R2.2 R4.2 R9.2 R10.2 U1.1 U1.24 U1.36 U1.48 | length 90.6
  Top Layer w0.178: v1@115.76,60.567 v1(115.976,60.35) ; J1.5 121.222,56.706 123.927,59.411 v1(123.927,62.179)
  Top Layer w0.254: R9.2 C19.2@105.004,71.184 ; C19.2@105.004,71.171 105.004,70.409 v1(106.731,68.682) v1@106.744,68.668 ; U1.48 106.795,68.617 v1@106.744,68.668 ; U1.24 114.617,60.567 ; R2.2 114.999,70.319 115.418,69.901 115.418,67.666 115.094,67.342 U1.36 U1.1 v1@106.744,68.668 ; C13.2@115.265,58.852 115.265,59.919 114.617,60.567 ; v1@115.76,60.567 114.617,60.567
  Bottom Layer w0.178: R10.2 99.56,63.906 P5.5 ; P2.1 113.118,55.181 113.894,55.956 113.894,56.49 114.085,56.681 P2.5 115.392,56.681 115.392,59.741 v1@116.027,60.376 ; 119.914,59.411 119.914,57.404 120.675,56.642 v1(121.158,56.642) ; P1.5 v1@124.009,62.097
  Bottom Layer w0.254: P5.5 99.761,64.836 100.228,65.303 102.514,65.303 102.921,65.71 C18.2 104.486,66.814 104.648,66.976 C17.1@105.562,66.976 ; R4.2 103.542,61.023 103.784,61.265 ; P3.1 105.769,53.645 105.74,53.645 103.784,55.601 103.784,61.265 ; v1(106.731,68.682) 106.731,67.996 ; C14.2@114.833,67.908 C15.2 L1.2 106.819,67.908 106.731,67.996 ; 119.914,59.411 P1.1 ; 103.784,61.265 103.784,62.763 105.562,64.541 C17.1@105.562,66.976 ; C17.1@105.562,66.976 106.016,66.976 106.731,67.691 106.731,67.996
VDDA: C20.2 C21.1 C22.2 L1.1 U1.9 | length 17.7
  Top Layer w0.178: v1(104.699,62.382) 104.699,63.017 105.024,63.342 U1.9
  Bottom Layer w0.254: v1(104.699,62.382) 104.699,63.017 105.029,63.348 106.553,63.348 ; L1.1 107.378,66.408 106.553,65.583 106.553,63.348 ; C22.2 C20.2 108.239,61.836 108.077,61.998 107.42,61.998 106.553,62.865 106.553,63.348
VOUT1: P7.6 R13.2 | length 12.1
  Top Layer w0.178: R13.2 106.514,59.576 v1@106.629,59.461 ; P7.6@108.85,50.6 109.017,50.767 109.017,53.569 109.652,54.204 v1(109.652,54.407)
  Bottom Layer w0.178: v1(106.604,59.449) 109.652,56.401 v1(109.652,54.407)
VOUT1_BUF: C24.2 R13.1 U1.11 | length 7.3
  Top Layer w0.178: R13.1 104.23,58.076 103.937,58.369 103.937,60.096 104.382,60.542 C24.2 105.359,60.985 105.385,61.011 105.385,61.798 105.929,62.342 U1.11
VOUT2: P7.3 R20.2 | length 9.9
  Top Layer w0.178: R20.2 111.24,49.466 111.706,49 P7.3@113.15,49
VOUT2_BUF: C25.2 R20.1 U1.16 | length 3.3
  Top Layer w0.178: U1.16 109.519,58.717 C25.2@109.613,58.623 ; R20.1@109.74,57.328 C25.2
VTX1_OUT: P1.6 P6.6 | length 6.1
  Top Layer w0.178: P6.6@123.65,63.4 125.398,63.4 v1(125.73,63.068)
  Bottom Layer w0.178: P1.6 123.821,60.702 125.73,62.611 v1(125.73,63.068)
VTX2_OUT: P1.7 P6.7 | length 6.2
  Top Layer w0.178: v1(122.098,62.332) 122.022,62.408 122.022,63.627 122.595,64.2 P6.7@123.65,64.2
  Bottom Layer w0.178: v1@122.174,62.255 122.098,62.179 122.098,60.376 122.272,60.202 P1.7
VTX3_OUT: P2.6 P6.8 | length 14.6
  Top Layer w0.178: v1(121.691,64.567) 122.125,65 P6.8@123.65,65
  Bottom Layer w0.178: P2.6 116.226,56.181 116.738,56.693 116.738,61.29 119.532,64.084 121.209,64.084 v1(121.691,64.567)
pads on no net: J1. J1.1 J2.6 P2.2 P2.7 P3.3 P3.5 P3.6 P3.7 P3.8 P3.9 P3.10 P3.11 P3.12 P3.13 P3.18 P3.21 P3.22 P3.23 P3.25 P3.27 P3.28 P3.29 P3.31 P3.32 P3.33 P4.4 P5.4 P11.4 U1.3 U1.4 U1.10 U1.17 U1.18 U1.19 U1.20 U1.21 U1.22 U1.28 U1.39 U1.40 U1.41 U1.42 U1.43 U1.45 U1.46

## Polygon pours and split planes (outlines as drawn)
GND on GND "Top Layer-No Net" (solid, pour order 10): 127.5,45 92.5,45 92.5,72 127.5,72
VCC on VCC "Top Layer-No Net" (solid, pour order 12): 92.5,45 92.5,72 127.5,72 127.5,45

## Keep-outs
Keep-Out Layer:
  lines w0.254: 92.5,45 127.5,45 127.5,72 92.5,72 92.5,45

## Other copper
Bottom Layer:
  text "Tokyo University" at 123.165,71.349 h1.1 r90
  text "Version 2.0" at 113.132,69.266 h1.1
  text "Version2.4" at 126.314,68.707 h1.1 r90
  text "JSK Laser" at 125.019,68.529 h1.1 r90
  text "Designed by Chen" at 125.527,50.622 h1.1 r270

## Dimensions
92.5,45 to 127.5,45 on Top Layer
92.5,72 to 92.5,45 on Top Layer